# Altium PCB DaughterBoards.PcbDoc (part 3 of 4)
Units mil, origin at the board's own origin, x right, y up, seen from the top; angles counter-clockwise.
Board outline 8080.87 x 6506.06 mil, 4 copper layers (Top Layer, Top, Mid-Layer 1, GND, Mid-Layer 2, VCC, Bottom Layer, Bottom), stack 18.2 mil thick; 508 components, 296 nets, 1635 pads, 376 vias.
Unrouted connection lines stored in the file: 28.
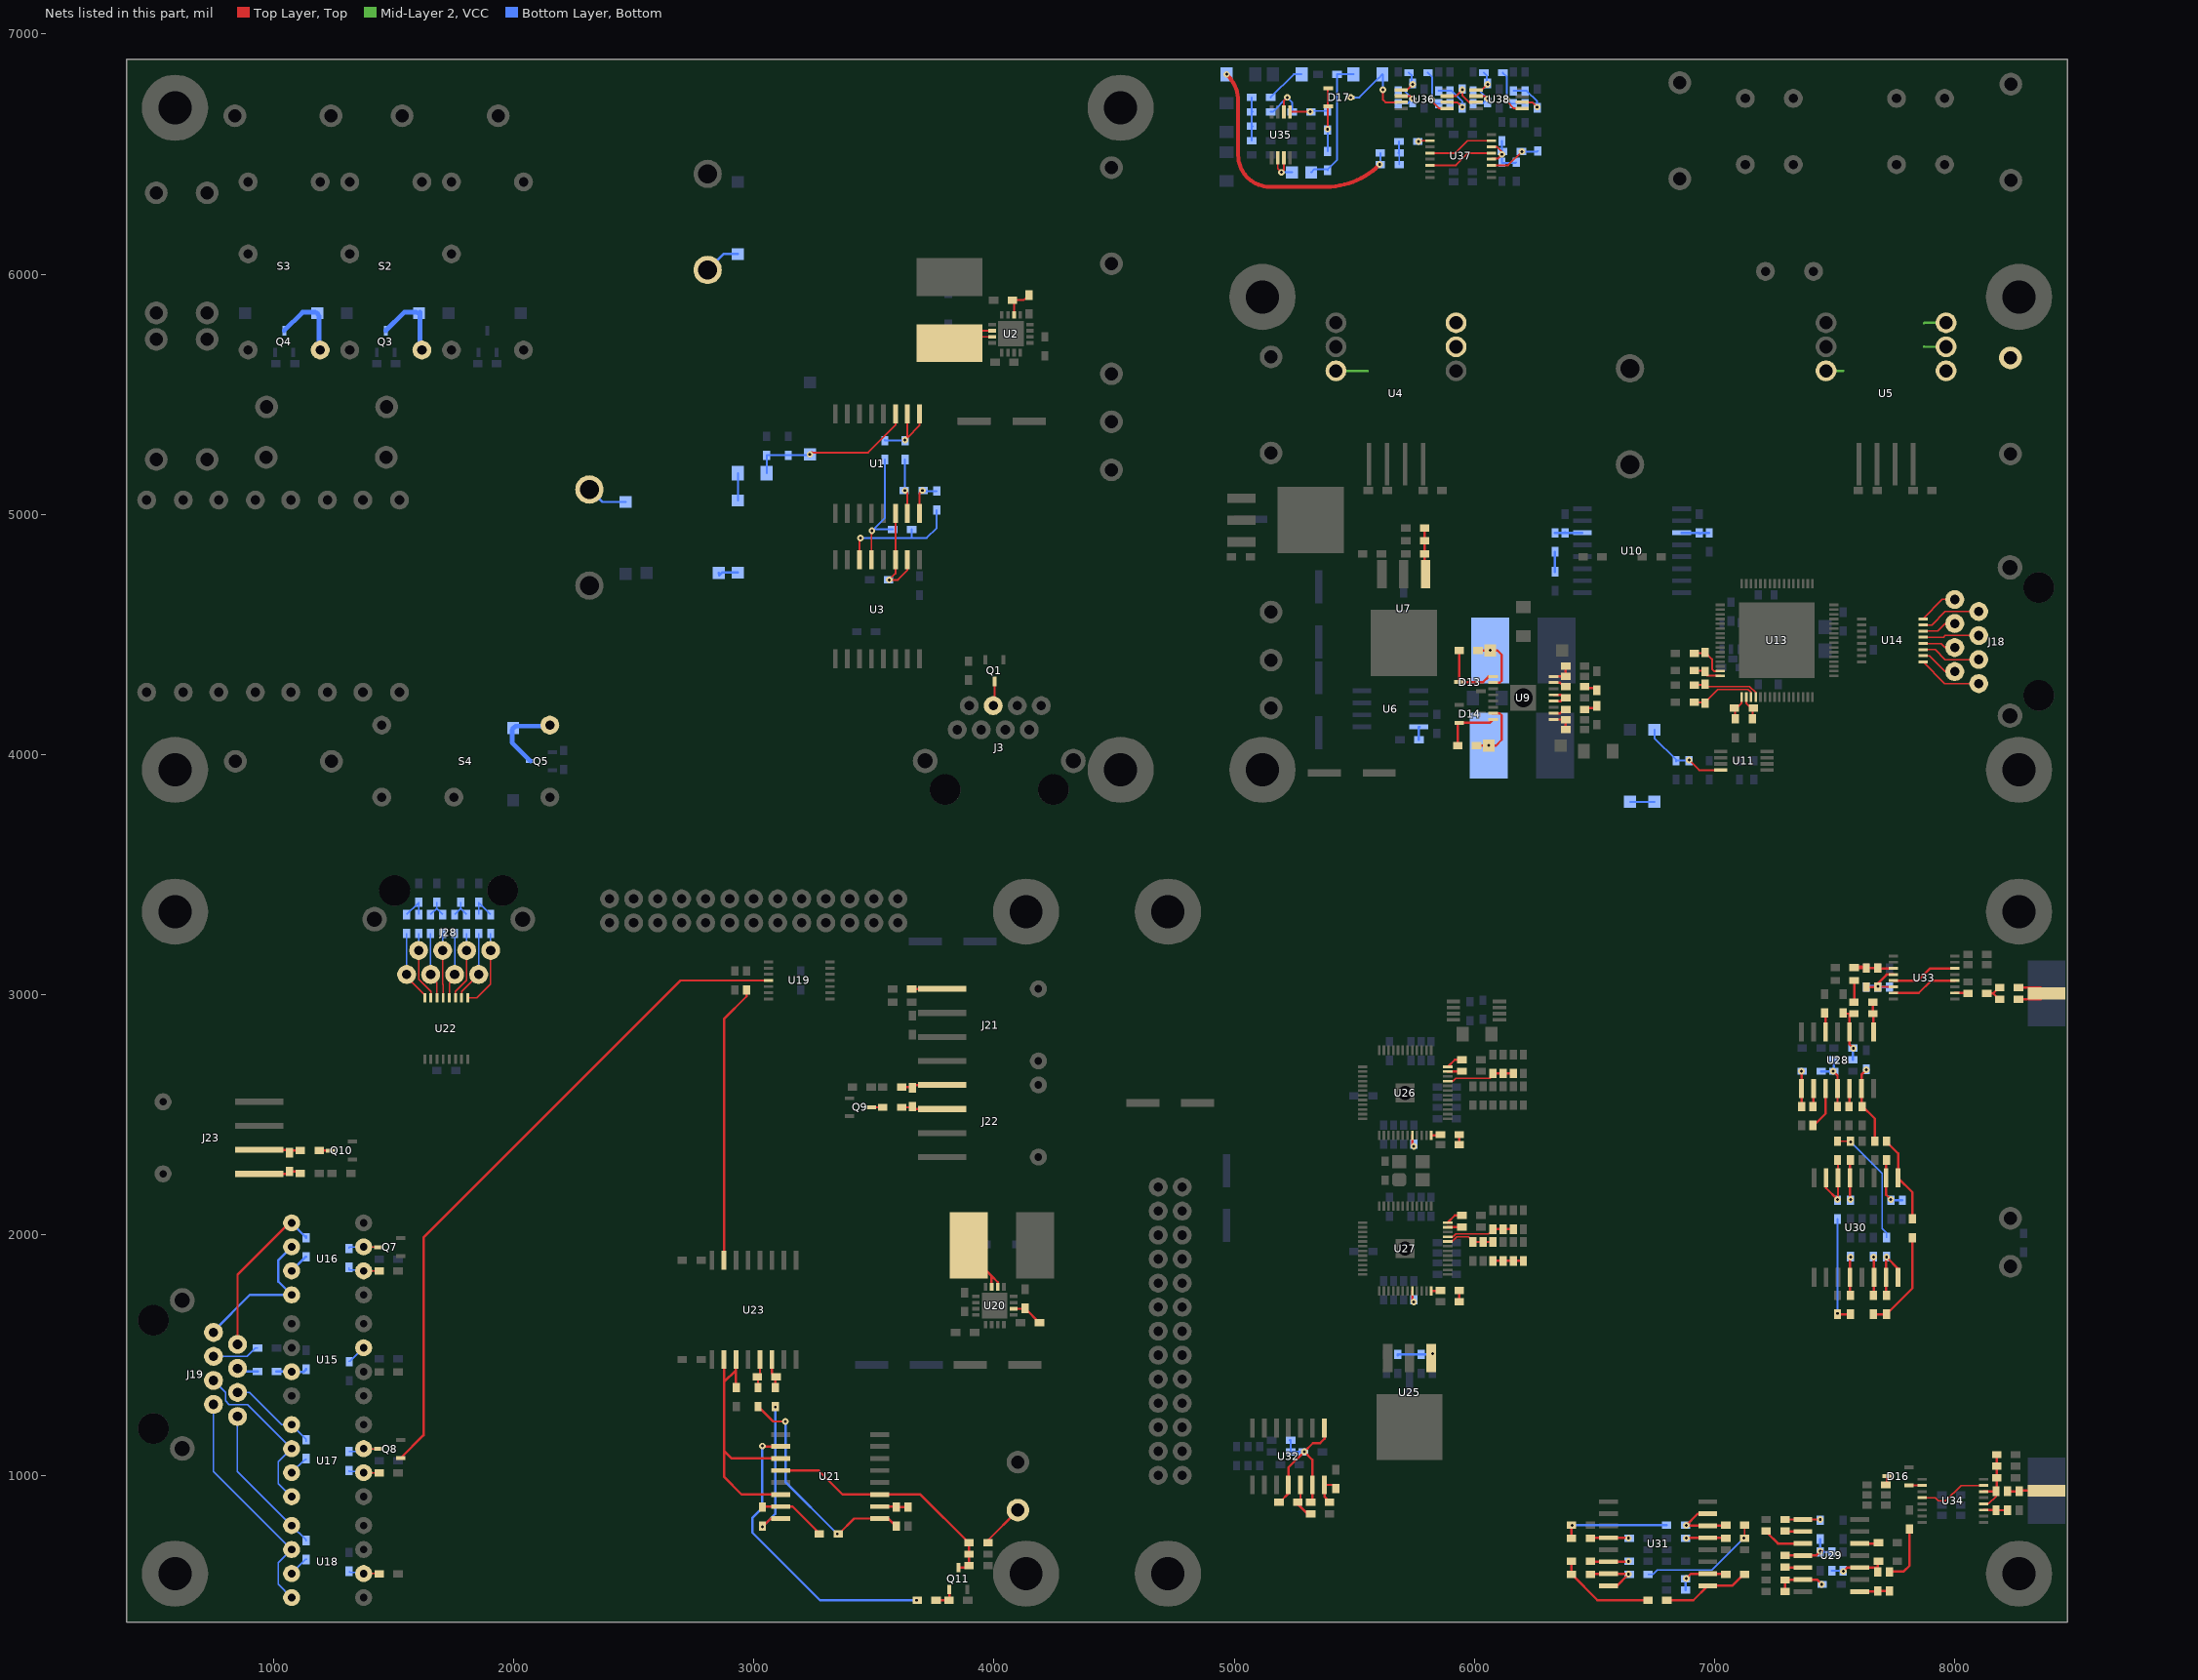
[diagram p5: the nets of this part, all layers, seen from the top]

## Via types
v1: diameter 27.56, hole 11.81, Top Layer, Top to Bottom Layer, Bottom, 373 vias
v2: diameter 98.43, hole 78.74, Top Layer, Top to Bottom Layer, Bottom, 2 vias
v3: diameter 157.48, hole 137.8, Top Layer, Top to Bottom Layer, Bottom, 1 vias

## Nets (pads, with @x,y where several pads share a name; then routed paths per layer and width w, separated by ;. In a path a pad name is that pad's centre, name@x,y a point inside that pad or via, vN(x,y) a via of type N, cw(c..) or ccw(c..) an arc to the next point about the centre after c; other vN are vias at no path point) (continued)
NET00006: C120.1 R96.1 R97.1 U26.21 | length 335.9
  Top Layer, Top w5.98: U26.21@5889.17,2641.21 5911.21,2641.21 5922,2652 5952,2652
  Top Layer, Top w6: 5952,2652 6066,2652 6078,2664 R97.1@6078,2672.63 6081.37,2672.63 6111.37,2672.63 6114,2670 R96.1@6120,2672.63
  Top Layer, Top w9.84: R97.1@6078,2676 6081.37,2672.63 6111.37,2672.63 R96.1@6120,2672.63 C120.1@6162,2672.63
NET00007: R50.1 R51.1 U15.3 | length 129.3
  Bottom Layer, Bottom w9.84: R50.1@1013.37,1433 1067.98,1433 1070.98,1430 U15.3@1076,1431 1126.98,1431 1135.98,1440 R51.1@1136,1441.63
NET00008: J18.8 U14.16 | length 165.4
  Top Layer, Top w5.98: U14.16@7867.95,4565.57 7948.37,4645.98 J18.8@8000,4646
NET00009: C9.2 R24.1 U3.6 | length 537.7
  Top Layer, Top w7.87: U3.6@3440,4812 3440,4898 v1(3444,4902)
  Bottom Layer, Bottom w7.87: v1(3444,4902) 3657.37,4902 ; C9.2@3657.37,4938 3657.37,4902 ; R24.1@3762,5018.63 3762,4944 3720,4902 3657.37,4902
NET00010: D8.1 Q3.3 S2.2 | length 336.2
  Bottom Layer, Bottom w19.68: Q3.3@1468.36,5765.24 1544.88,5841.76 1594.35,5841.76 D8.1@1606.16,5837.83 1610.09,5841.76 1610.09,5692.94 S2.2@1618.36,5684.68
NET00011: R190.2 R191.2 R195.1 U38.6 | length 214.7
  Top Layer, Top w7.87: U38.6@6199.07,6715.77 6241.93,6715.77 v1(6261.7,6696)
  Bottom Layer, Bottom w7.87: R191.2@6163.24,6763.61 R190.2@6211.28,6763.61 6218.09,6763.61 6261.7,6720 v1(6261.7,6696) R195.1@6261.7,6692.63
NET00012: C115.1 U26.8 | length 56.1
  Top Layer, Top w9.84: U26.8@5741.53,2414.83 5741.53,2376.47 v1(5748,2370)
  Bottom Layer, Bottom w9.84: v1(5748,2370) C115.1@5748,2378.63
NET00013: C114.1 R93.2 | length 46.8
  Top Layer, Top w9.84: C114.1@5937.37,2376 5934,2376 5937.37,2379.37 R93.2@5937.37,2418
NET00014: R93.1 U26.12 | length 39.7
  Top Layer, Top w9.84: U26.12@5820.27,2414.83 5846.83,2414.83 5850,2418 R93.1@5858.63,2418
NET00015: R56.2 R59.2 U16.2 | length 138
  Top Layer, Top w5.98: U16.2@1376,1851 1390,1850 R59.2@1440.63,1850
  Bottom Layer, Bottom w5.98: R56.2@1315,1865.63 1315,1855 1372,1855 U16.2@1376,1851
NET00016: R188.2 R189.2 R194.1 U38.2 | length 209.9
  Top Layer, Top w7.87: U38.2@6007.14,6741.36 6044.74,6741.36 v1(6055.17,6730.93)
  Bottom Layer, Bottom w7.87: R189.2@5995.13,6710.26 6034.5,6710.26 v1(6055.17,6730.93) ; R188.2@5995.13,6763.61 6022.5,6763.61 v1(6055.17,6730.93) ; R194.1@6055.17,6715.57 v1(6055.17,6730.93)
NET00017: Q7.3 R56.1 U16.3 | length 130.6
  Top Layer, Top w5.98: U16.3@1376,1951 1390,1950 Q7.3@1439.47,1950
  Bottom Layer, Bottom w5.98: R56.1@1315,1944.37 1315,1950 1375,1950 U16.3@1376,1951
NET00018: C187.1 R192.2 R193.2 U38.5 | length 283.9
  Top Layer, Top w7.87: v1(6135.7,6726) 6135.7,6720 6165.52,6690.18 U38.5@6199.07,6690.18
  Bottom Layer, Bottom w7.87: C187.1@6118.56,6839 6135.7,6821.86 v1(6135.7,6726) 6151.44,6710.26 R193.2@6163.24,6710.26 R192.2@6211.28,6710.26
NET00019: U5.1 U5.4 U5.5 | length 257.7
  Mid-Layer 2, VCC w9.84: U5.1@7464,5598 7536,5598 ; 7872,5700 7874,5698 U5.5@7964,5698 ; 7872,5796 7874,5798 U5.4@7964,5798
NET00020: D9.1 Q4.3 S3.2 | length 327.7
  Bottom Layer, Bottom w19.68: Q4.3@1045.12,5765.24 1121.64,5841.76 1175.04,5841.76 D9.1@1182.91,5837.83 1190.79,5826.02 1190.79,5689.01 S3.2@1195.12,5684.68
NET00021: R187.2 U36.7 U38.3 | length 170.2
  Top Layer, Top w7.87: U36.7@5887.07,6741.36 5923.06,6741.36 v1(5949.7,6768) 5949.7,6744 5977.93,6715.77 U38.3@6007.14,6715.77
  Bottom Layer, Bottom w7.87: v1(5949.7,6768) R187.2@5949.7,6771.37
NET00022: C31.2 D13.3 U9.1 | length 286.9
  Top Layer, Top w9.84: C31.2@5936.63,4434 5936.63,4304.63 5934,4302 D13.3@5936.47,4302 6036,4302 6059.57,4325.57 U9.1@6078.02,4325.57
NET00023: R31.1 U9.15 | length 57.3
  Top Layer, Top w9.84: U9.15@6329.98,4299.98 6356.02,4299.98 6372,4284 R31.1@6380.63,4284
NET00024: R55.2 U15.7 | length 87
  Bottom Layer, Bottom w5.98: R55.2@1316,1472.37 1315,1475 1320,1475 U15.7@1376,1531
NET00025: C181.2 R186.2 U36.1 | length 112.3
  Top Layer, Top w7.87: U36.1@5695.14,6766.95 5719.16,6766.95 v1(5743.17,6790.97)
  Bottom Layer, Bottom w7.87: C181.2@5727.82,6839 5739.7,6827.12 5739.7,6798 R186.2@5743.17,6794.31 v1(5743.17,6790.97)
NET00026: J19.2 R52.2 U16.5 | length 694.3
  Top Layer, Top w9.84: J19.2@850.98,1545 850.98,1835 1066.98,2051 U16.5@1076,2051
  Bottom Layer, Bottom w9.84: U16.5@1076,2051 1132,1995 1135.98,1995 R52.2@1136,1988.37
NET00027: C187.2 R194.2 U38.1 | length 112.3
  Top Layer, Top w7.87: U38.1@6007.14,6766.95 6031.16,6766.95 v1(6055.17,6790.97)
  Bottom Layer, Bottom w7.87: C187.2@6039.82,6839 6051.7,6827.12 6051.7,6798 R194.2@6055.17,6794.31 v1(6055.17,6790.97)
NET00028: C178.2 J41.1 R175.2 R176.1 | length 557.7
  Bottom Layer, Bottom w7.87: R175.2@5320.91,6424.21 5332.91,6436.22 R176.1@5388.98,6436.22 ; R176.1@5388.98,6432.87 R176.1@5388.98,6436.22 ; J41.1@5497.09,6832.48 C178.2@5428.35,6832.48 5428.35,6475.59 R176.1@5388.98,6436.22
NET00029: R52.1 U16.7 | length 84.8
  Bottom Layer, Bottom w9.84: U16.7@1076,1851 1135,1910 1135.98,1910 R52.1@1136,1909.63
NET00030: R33.1 R34.1 U9.9 | length 97.6
  Top Layer, Top w9.84: U9.9@6329.98,4146.43 6371.57,4146.43 6372,4146 R33.1@6380.63,4146 6384,4146 6380.63,4142.63 R34.1@6380.63,4104
NET00031: J19.1 U16.6 U16.8 | length 639
  Bottom Layer, Bottom w9.84: J19.1@750.98,1595 750,1596 750.98,1596.98 750.98,1600 901.98,1751 U16.8@1076,1751 1020.98,1806.02 1020.98,1895.98 U16.6@1076,1951
NET00032: R32.1 U9.10 | length 57.3
  Top Layer, Top w9.84: U9.10@6329.98,4172.02 6356.02,4172.02 6372,4188 R32.1@6380.63,4188
NET00033: D10.1 Q5.3 S4.2 | length 327.7
  Bottom Layer, Bottom w19.68: Q5.3@2070.76,3973.12 1994.24,4049.64 1994.24,4103.04 D10.1@1998.17,4110.91 2009.98,4118.79 2146.99,4118.79 S4.2@2151.32,4123.12
NET00034: C36.1 D14.2 U9.8 | length 247.3
  Top Layer, Top w9.84: C36.1@5930.63,4038 5930.63,4130.63 5934,4134 D14.2@5936.53,4132.5 5940,4134 6065.58,4134 U9.8@6078.02,4146.43
NET00035: C32.1 R31.2 | length 58.2
  Top Layer, Top w9.84: R31.2@6459.37,4284 6465.37,4278 6504,4278 C32.1@6510,4268.63
NET00036: C86.2 R90.1 R91.2 U25.1 | length 172.7
  Top Layer, Top w9.84: U25.1@5820.55,1488 5820.55,1500.55 v1(5826,1506)
  Bottom Layer, Bottom w9.84: R91.2@5682,1503.37 5682,1500 5685.37,1503.37 C86.2@5778,1503.37 5823.37,1503.37 v1(5826,1506) R90.1@5826,1503.37
NET00037: R29.2 R30.1 U9.16 | length 93.9
  Top Layer, Top w9.84: U9.16@6329.98,4325.57 6371.57,4325.57 6372,4326 R30.1@6378,4326 ; R30.1@6380.63,4326 R30.1@6378,4326 ; R29.2@6380.63,4368 6380.63,4328.63 R30.1@6378,4326
NET00038: C31.1 D12.2 L2.2 U9.2 | length 253.6
  Top Layer, Top w9.84: C31.1@6015.37,4434 v1(6066,4434) 6096,4434 6114,4416 6114,4308 6105.98,4299.98 U9.2@6078.02,4299.98
  Bottom Layer, Bottom w9.84: v1(6066,4434) L2.2@6066.2,4434
NET00039: R92.1 U26.24 | length 71.8
  Top Layer, Top w9.84: U26.24@5889.17,2700.27 5918.9,2730 R92.1@5948.63,2730
NET00040: C113.1 U26.23 | length 60.1
  Top Layer, Top w9.84: U26.23@5889.17,2680.58 5944.58,2680.58 5946,2682 C113.1@5948.63,2682
NET00041: J19.5 U17.6 U17.8 | length 708.7
  Bottom Layer, Bottom w5.98: J19.5@750.98,1395 800.98,1345 800.98,1310 815.98,1295 892,1295 U17.6@1076,1111 1020.98,1055.98 1020.98,966.02 U17.8@1076,911
NET00042: J3.4 Q1.3 | length 103.7
  Top Layer, Top w7.87: J3.4@3997.15,4204 4002,4206 Q1.3@4002,4304.47
NET00043: R53.1 U17.7 | length 87
  Bottom Layer, Bottom w5.98: U17.7@1076,1011 1130,1065 1135.98,1065 R53.1@1136,1069.63
NET00044: J19.6 R53.2 U17.5 | length 384.7
  Bottom Layer, Bottom w5.98: J19.6@850.98,1345 900.98,1345 1034.98,1211 U17.5@1076,1211 1135.98,1151.02 1135.98,1140 R53.2@1136,1148.37
NET00045: C1.2 C2.1 R4.1 R5.2 | length 324.4
  Bottom Layer, Bottom w9.84: C1.2@2316,5104 2322,5100 2370,5052 R4.1@2466,5052 ; C2.1@2808,6018 2874,6084 R5.2@2934,6084
NET00046: R57.2 R61.2 U17.2 | length 133
  Top Layer, Top w5.98: U17.2@1376,1011 1385,1010 R61.2@1440.63,1010
  Bottom Layer, Bottom w5.98: R57.2@1315,1020.63 1315,1015 1372,1015 U17.2@1376,1011
NET00047: C36.2 D15.2 L3.1 U9.7 | length 256.1
  Top Layer, Top w9.84: C36.2@6009.37,4038 v1(6060,4038) 6090,4038 6114,4062 6114,4164 6105.98,4172.02 U9.7@6078.02,4172.02
  Bottom Layer, Bottom w9.84: v1(6060,4038) L3.1@6060.2,4038
NET00048: L1.1 U2.14 U2.15 | length 302.3
  Top Layer, Top w7.87: L1.1@3815.17,5713.09 3858,5736 3861.66,5739.66 L1.1@3915.66,5739.66 ; L1.1@3894,5718 L1.1@3915.66,5739.66 ; U2.15@3992.33,5739.66 L1.1@3915.66,5739.66 ; U2.14@3992.33,5765.25 3941.25,5765.25 L1.1@3915.66,5739.66
NET00049: C34.1 U9.12 U9.13 | length 103.3
  Top Layer, Top w9.84: U9.12@6329.98,4223.2 6359.2,4223.2 C34.1@6372,4236 ; U9.13@6329.98,4248.8 6359.2,4248.8 C34.1@6372,4236 ; C34.1@6380.63,4236 C34.1@6372,4236
NET00050: Q8.3 R57.1 U17.3 | length 129.7
  Top Layer, Top w5.98: U17.3@1376,1111 1385,1110 Q8.3@1439.47,1110
  Bottom Layer, Bottom w5.98: R57.1@1315,1099.37 1315,1100 1365,1100 U17.3@1376,1111
NET00051: J12.1 U5.6
NET00052: R25.1 R26.2 U2.10 | length 145.7
  Top Layer, Top w7.87: U2.10@4083.87,5831.2 4083.87,5882.13 4074,5892 R25.1@4077.37,5892 4124.63,5892 R26.2@4146,5913.37
NET00053: C35.1 R32.2 | length 62.5
  Top Layer, Top w9.84: R32.2@6459.37,4188 6465.37,4194 6510,4194 C35.1@6510,4203.37
NET00054: J18.7 U14.15 | length 255.2
  Top Layer, Top w5.98: U14.15@7867.95,4539.98 7903.99,4539.98 7960,4595.98 J18.7@8100,4596
NET00055: R40.1 R41.2 | length 102
  Bottom Layer, Bottom w7.87: R40.1@6648,3804 R41.2@6750,3804
NET00056: J21.1 R65.2 | length 134.5
  Top Layer, Top w9.84: R65.2@3657.37,3024 3660,3018 3667,3025 J21.1@3785,3025
NET00057: R16.1 R17.1 | length 94.2
  Bottom Layer, Bottom w9.84: R16.1@2854.43,4757.1 2856,4746 2868,4758 R17.1@2934,4758
NET00058: R17.2 R18.2 | length 114
  Bottom Layer, Bottom w7.87: R17.2@2934,5058 R18.2@2934,5172
NET00059: C24.2 R27.1 R28.2 U7.1 | length 196.8
  Top Layer, Top w9.84: C24.2@5793.37,4944 R28.2@5793.37,4890 R27.1@5793.37,4836 U7.1@5793.37,4796.63 ; U7.1@5796,4794 U7.1@5793.37,4796.63 ; U7.1@5796.55,4752 5796,4776 5793.37,4778.63 U7.1@5793.37,4796.63
NET00060: R20.1 R23.2 U1.1 U1.2 | length 321.2
  Top Layer, Top w7.87: v1(3630,5310) 3640,5320 ; U1.2@3640,5418 3640,5320 ; U1.1@3690,5418 3690,5370 3640,5320
  Bottom Layer, Bottom w7.87: R23.2@3546,5307.37 3546,5310 3548.63,5307.37 R20.1@3630,5307.37 v1(3630,5310)
NET00061: C26.1 U6.8 | length 58.9
  Bottom Layer, Bottom w9.84: U6.8@5768.22,4116 5772,4116 5769.37,4113.37 C26.1@5769.37,4062
NET00062: J19.8 R54.2 U18.5 | length 641.4
  Bottom Layer, Bottom w5.98: J19.8@850.98,1245 850.98,1016.02 U18.5@1076,791 1135.98,731.02 1135.98,725 R54.2@1136,728.37
NET00063: R21.1 R24.2 U1.16 | length 164.8
  Top Layer, Top w7.87: U1.16@3690,5004.61 3690,5088 v1(3702,5100)
  Bottom Layer, Bottom w7.87: R21.1@3705.37,5100 v1(3702,5100) 3704.63,5097.37 R24.2@3762,5097.37
NET00064: R20.2 R21.2 U1.15 | length 231.5
  Top Layer, Top w7.87: v1(3630,5100) 3640,5090 U1.15@3640,5004.61
  Bottom Layer, Bottom w7.87: R21.2@3626.63,5100 v1(3630,5100) R20.2@3630,5228.63
NET00065: C10.1 U1.14 U3.2 U3.3 | length 433.7
  Top Layer, Top w7.87: v1@3558,4728 v1(3564,4728) ; U1.14@3590,5004.61 3590,4820 3588,4818 U3.3@3590,4812 3590,4754 v1(3564,4728) ; U3.2@3640,4812 3640,4768 3600,4728 v1(3564,4728)
  Bottom Layer, Bottom w7.87: C10.1@3561.37,4728 v1(3564,4728)
NET00066: C9.1 R23.1 U3.5 | length 520.5
  Top Layer, Top w7.87: U3.5@3490,4812 3490,4930 v1(3492,4932)
  Bottom Layer, Bottom w7.87: v1(3492,4932) v1@3498,4938 ; R23.1@3546,5228.63 3546,4986 v1@3498,4938 ; C9.1@3578.63,4938 v1@3498,4938
NET00067: R54.1 U18.7 | length 94.4
  Bottom Layer, Bottom w5.98: U18.7@1076,591 1135,650 1140.98,650 R54.1@1136,649.63
NET00068: J19.7 U18.6 U18.8 | length 984.2
  Bottom Layer, Bottom w5.98: J19.7@750.98,1295 750.98,1016.02 U18.6@1076,691 1020.98,635.98 1020.98,546.02 U18.8@1076,491
NET00069: J18.6 U14.14 | length 145.1
  Top Layer, Top w5.98: U14.14@7867.95,4514.39 7928.4,4514.39 7960,4545.98 J18.6@8000,4546
NET00070: R58.2 R62.2 U18.2 | length 138
  Top Layer, Top w5.98: U18.2@1376,591 1434,591 1440,585 R62.2@1440.63,590
  Bottom Layer, Bottom w5.98: R58.2@1315,600.63 1320.63,595 1375,595 U18.2@1376,591
NET00071: J18.5 U14.13 | length 235
  Top Layer, Top w5.98: U14.13@7867.95,4488.8 7952.81,4488.8 7960,4495.98 J18.5@8100,4496
NET00072: J19.4 R50.2 | length 88.6
  Bottom Layer, Bottom w9.84: J19.4@850.98,1445 862.98,1433 R50.2@934.63,1433
NET00073: J19.3 R49.2 | length 197.7
  Bottom Layer, Bottom w5.98: J19.3@750.98,1495 890.98,1495 924.98,1529 R49.2@934.63,1529
NET00074: J18.4 U14.12 | length 139.2
  Top Layer, Top w5.98: U14.12@7867.95,4463.2 7942.78,4463.2 7960,4445.98 J18.4@8000,4446
NET00075: C79.2 R89.1 U23.6 | length 126
  Top Layer, Top w9.84: U23.6@3076,1482 3076,1424 3084,1416 C79.2@3093.37,1410 3090,1404 R89.1@3090,1365.37
NET00076: J18.3 U14.11 | length 249.3
  Top Layer, Top w5.98: U14.11@7867.95,4437.61 7918.37,4437.61 7960,4395.98 J18.3@8100,4396
NET00077: J18.2 U14.10 | length 159.4
  Top Layer, Top w5.98: U14.10@7867.95,4412.02 7893.96,4412.02 7960,4345.98 J18.2@8000,4346
NET00078: J18.1 U14.9 | length 269.5
  Top Layer, Top w5.98: U14.9@7867.95,4386.43 7958.4,4295.98 J18.1@8100,4296
NET00079: R198.2 U23.15 | length 1164.2
  Top Layer, Top w9.84: U23.15@2876,1895.39 2876,2900 2970,2994 R198.2@2970,3020.63
NET00080: C142.2 R143.1 U30.6 U30.7 | length 278.8
  Top Layer, Top w9.84: U30.7@7464,2238 7464,2196 v1(7512,2148) 7514,2150 U30.6@7514,2238 7514,2308 7512,2310 C142.2@7512,2312.63
  Bottom Layer, Bottom w9.84: R143.1@7512,2145.37 v1(7512,2148)
NET00082: C146.2 R128.1 U30.15 U30.16 | length 266.2
  Top Layer, Top w9.84: C146.2@7716,1749.37 7716,1752 7714,1754 U30.15@7714,1824.61 7714,1906 v1(7716,1908) 7764,1860 U30.16@7764,1824.61
  Bottom Layer, Bottom w9.84: v1(7716,1908) R128.1@7716,1910.63
NET00086: J22.1 R63.2 R66.2 | length 176
  Top Layer, Top w9.84: R66.2@3615.37,2616 R63.2@3660,2616 ; R63.2@3660,2613.37 R63.2@3660,2616 ; J22.1@3785,2625 3669,2625 R63.2@3660,2616
NET00087: J22.2 R63.1 R67.2 | length 181.2
  Top Layer, Top w9.84: R67.2@3615.37,2532 3654,2532 R63.1@3660,2526 ; R63.1@3660,2534.63 R63.1@3660,2526 ; J22.2@3785,2525 3661,2525 R63.1@3660,2526
NET00088: Q8.1 U19.4 | length 2836.9
  Top Layer, Top w9.84: Q8.1@1530.47,1072.5 1625,1167.03 1625,1990 2695,3060 U19.4@3062.05,3060
NET00099: L4.1 U20.14 U20.15 | length 261.3
  Top Layer, Top w9.84: L4.1@3895.54,1957.93 3950,1875 3965,1860 3965,1855 3990.45,1829.55 ; U20.15@3990.45,1784.92 3990.45,1829.55 ; U20.14@4016.04,1784.92 4016.04,1803.96 3990.45,1829.55
NET00100: R71.1 R72.2 U20.10 | length 140.5
  Top Layer, Top w9.84: U20.10@4081.98,1693.39 4126.61,1693.39 4130,1690 R71.1@4130,1695 ; R71.1@4130,1695.63 R71.1@4130,1695 ; R72.2@4189.37,1635 4190,1635 R71.1@4130,1695
NET00102: Q9.3 R67.1 | length 47.1
  Top Layer, Top w9.84: Q9.3@3489.53,2532 R67.1@3536.63,2532
NET00103: J23.2 R64.1 R69.2 | length 180.5
  Top Layer, Top w9.84: J23.2@940.98,2355 1059,2355 R64.1@1068,2346 ; R64.1@1068,2343.37 R64.1@1068,2346 ; R69.2@1112.63,2352 1074,2352 R64.1@1068,2346
NET00104: J23.1 R64.2 R68.2 | length 184.3
  Top Layer, Top w9.84: J23.1@940.98,2255 1067,2255 1068,2256 R64.2@1068,2264.63 1101.37,2264.63 1110,2256 R68.2@1112.63,2256
NET00113: Q10.3 R69.1 | length 47.1
  Top Layer, Top w9.84: R69.1@1191.37,2352 Q10.3@1238.47,2352
NET00114: J28.8 R82.2 U22.8 | length 298.9
  Top Layer, Top w5.98: J28.8@1555,3085 1555,3075 1630.43,2999.57 U22.8@1630.43,2987.95
  Bottom Layer, Bottom w5.98: J28.8@1555,3085 R82.2@1555,3255.63
NET00115: J28.5 R79.2 U22.5 | length 268.6
  Top Layer, Top w5.98: J28.5@1705,3185 1705,3045 1707.2,3042.8 U22.5@1707.2,2987.95
  Bottom Layer, Bottom w5.98: J28.5@1705,3185 R79.2@1705,3255.63
NET00116: J28.2 R75.2 U22.2 | length 297.1
  Top Layer, Top w5.98: U22.2@1783.98,2987.95 1783.98,3013.98 J28.2@1855,3085
  Bottom Layer, Bottom w5.98: J28.2@1855,3085 R75.2@1855,3255.63
NET00117: J28.6 R80.2 U22.6 | length 276.4
  Top Layer, Top w5.98: J28.6@1655,3085 1680,3050 1681.61,3048.39 U22.6@1681.61,2987.95
  Bottom Layer, Bottom w5.98: J28.6@1655,3085 R80.2@1655,3255.63
NET00118: J28.7 R81.2 U22.7 | length 288.8
  Top Layer, Top w5.98: J28.7@1605,3185 1605,3065 1656.02,3013.98 U22.7@1656.02,2987.95
  Bottom Layer, Bottom w5.98: J28.7@1605,3185 R81.2@1605,3255.63
NET00119: J28.1 R73.2 U22.1 | length 329.7
  Top Layer, Top w5.98: U22.1@1809.57,2987.95 1847.95,2987.95 1905,3045 J28.1@1905,3185
  Bottom Layer, Bottom w5.98: J28.1@1905,3185 R73.2@1905,3255.63
NET00120: J28.3 R76.2 U22.3 | length 287
  Top Layer, Top w5.98: U22.3@1758.39,2987.95 1758.39,3013.39 1805,3060 J28.3@1805,3185
  Bottom Layer, Bottom w5.98: J28.3@1805,3185 R76.2@1805,3255.63
NET00121: J28.4 R78.2 U22.4 | length 273.9
  Top Layer, Top w5.98: U22.4@1732.8,2987.95 1732.8,3047.8 1735,3050 J28.4@1755,3085
  Bottom Layer, Bottom w5.98: J28.4@1755,3085 R78.2@1755,3255.63
NET00122: C72.1 R73.1 R75.1 | length 120.2
  Bottom Layer, Bottom w5.98: R75.1@1855,3334.37 C72.1@1855,3380 ; C72.1@1855,3385.63 C72.1@1855,3380 ; R73.1@1905,3334.37 1859.37,3380 C72.1@1855,3380
NET00124: C123.2 C127.1 R106.1 R107.1 | length 133.1
  Top Layer, Top w9.84: C123.2@6078,1892.63 R107.1@6120,1892.63 R106.1@6162,1892.63 C127.1@6204,1892.63 6207.37,1892.63 C127.1@6210,1890
NET00125: C74.1 R76.1 R78.1 | length 97
  Bottom Layer, Bottom w5.98: R78.1@1755,3334.37 1780,3359.37 ; C74.1@1780,3385.63 1780,3359.37 ; R76.1@1805,3334.37 1780,3359.37
NET00128: C76.1 R79.1 R80.1 | length 97
  Bottom Layer, Bottom w5.98: R80.1@1655,3334.37 1680,3359.37 ; C76.1@1680,3385.63 1680,3359.37 ; R79.1@1705,3334.37 1680,3359.37
NET00131: C77.1 R81.1 R82.1 | length 120.2
  Bottom Layer, Bottom w5.98: R82.1@1555,3334.37 1600.63,3380 C77.1@1605,3380 ; R81.1@1605,3334.37 C77.1@1605,3380 ; C77.1@1605,3385.63 C77.1@1605,3380
NET00134: C75.1 Q11.3 R74.1 R77.2 U21.3 U21.12 | length 1064.4
  Top Layer, Top w9.84: U21.12@3111.61,1020 3270,1020 3370,920 U21.3@3525,920 3694,920 3894,720 R74.1@3896.63,720 3896.63,675.37 3900,672 R77.2@3896.63,672 3896.63,627.37 3900,624 C75.1@3896.63,624 3894,618 3891.53,615.53 Q11.3@3852,615.53
NET00135: C123.1 R102.1 R103.1 U27.20 | length 214
  Top Layer, Top w6: U27.20@5889.17,1973.53 5909.53,1973.53 5928,1992 5976,1992 5994,1974 R102.1@5994,1971.37
  Top Layer, Top w9.84: R102.1@5988,1968 5991.37,1971.37 R102.1@5994,1971.37 R103.1@6036,1971.37 C123.1@6078,1971.37
NET00136: C122.1 R100.1 R101.1 U27.21 | length 290.5
  Top Layer, Top w5.98: U27.21@5889.17,1993.21 5911.21,1993.21 5922,2004 5946,2004
  Top Layer, Top w6: 5946,2004 6060,2004 6072,2016 R100.1@6078,2024.63
  Top Layer, Top w9.84: R100.1@6078,2024.63 R101.1@6120,2024.63 6159.37,2024.63 6162,2022 C122.1@6162,2024.63
NET00137: R83.1 R84.2 R88.2 U21.1 | length 986.6
  Top Layer, Top w9.84: R88.2@3018,1286.63 3080.63,1224 v1(3132,1224) ; v1(3348,756) R83.1@3351.37,756 3354,756 3418,820 U21.1@3525,820 3560,820 3594,786 R84.2@3594,788.63
  Bottom Layer, Bottom w9.84: v1(3132,1224) 3132,972 v1(3348,756)
NET00139: C79.1 R88.1 U23.5 | length 127.7
  Top Layer, Top w9.84: R88.1@3018,1365.37 3018,1404 C79.1@3014.63,1410 3024,1410 3026,1412 U23.5@3026,1482
NET00140: R86.1 R89.2 U21.16 | length 613.7
  Top Layer, Top w9.84: v1(3036,786) R86.1@3036,788.63 3042,792 3070,820 U21.16@3111.61,820 ; v1(3090,1284) R89.2@3090,1286.63
  Bottom Layer, Bottom w9.84: v1(3036,786) 3090,840 v1(3090,1284)
NET00141: R83.2 R86.2 U21.15 | length 297.8
  Top Layer, Top w9.84: R86.2@3036,867.37 3030,870 U21.15@3111.61,870 3162,870 3270,762 R83.2@3272.63,756
NET00143: J29.1 R74.2 | length 186.4
  Top Layer, Top w9.84: R74.2@3975.37,720 3975.37,729.37 4098,852 J29.1@4100,855
NET00144: R84.1 R85.2 U21.2 | length 124.4
  Top Layer, Top w9.84: U21.2@3525,870 3594,870 R84.1@3594,867.37 3638.63,867.37 3642,864 R85.2@3642,867.37
NET00145: C80.1 U21.11 U21.14 U23.2 U23.3 | length 1191.3
  Top Layer, Top w9.84: U23.2@2876,1482 2876,1388 ; U23.3@2926,1482 2926,1438 ; C80.1@2928,1365.37 2928,1368 2926,1370 2926,1438 ; U21.14@3111.61,920 2988,920 2950,920 2876,994 2876,1102 ; U21.11@3111.61,1070 2908,1070 2876,1102 ; 2876,1102 2876,1388 ; 2876,1388 2926,1438
NET00146: R87.2 U21.10 | length 1257.3
  Top Layer, Top w9.84: v1(3036,1122) 3038,1120 U21.10@3111.61,1120 ; v1(3678,480) R87.2@3680.63,480
  Bottom Layer, Bottom w9.84: v1(3036,1122) 3036,864 2994,822 2994,762 3276,480 v1(3678,480)
NET00147: C73.1 Q11.1 R87.1 | length 101.8
  Top Layer, Top w9.84: R87.1@3759.37,480 C73.1@3812.63,480 3816,480 3814.5,481.5 Q11.1@3814.5,524.53
NET00148: C6.1 D22.2 R18.1 R19.2 U1.3 | length 720.3
  Top Layer, Top w7.87: v1@3242,5258 3476,5258 3590,5372 U1.3@3590,5418
  Top Layer, Top w9.84: v1(3234,5250) v1@3242,5258
  Bottom Layer, Bottom w7.87: R18.1@3054,5172 R19.2@3054,5244 ; R19.2@3054,5246.63 R19.2@3054,5244 ; D22.2@3234,5238 D22.2@3234,5246.63 ; v1(3234,5250) D22.2@3234,5246.63 ; R19.2@3054,5244 3056.63,5246.63 C6.1@3144,5246.63 D22.2@3234,5246.63
NET00152: C170.2 R163.1 R164.2 R165.1 U34.4 U34.6 | length 304.8
  Top Layer, Top w5.98: U34.4@8119.95,881.2 8141.2,881.2 8172,912 8172,930 R165.1@8172,933.37 R165.1@8172,936
  Top Layer, Top w9.84: U34.6@8119.95,932.39 R165.1@8168.39,932.39 ; R165.1@8166,930 R165.1@8168.39,932.39 ; R165.1@8172,933.37 8172,930 8169.61,932.39 R165.1@8168.39,932.39 ; R163.1@8174.63,1086 R164.2@8174.63,1038 C170.2@8174.63,990 8174.63,938.63 8172,936 R165.1@8168.39,932.39
NET00154: C172.1 R165.2 U34.3 | length 108.1
  Top Layer, Top w9.84: U34.3@8119.95,855.61 8169.61,855.61 8172,858 R165.2@8172,854.63 8217.37,854.63 8220,852 C172.1@8220,854.63
NET00160: R95.1 U27.12 | length 39.7
  Top Layer, Top w9.84: U27.12@5820.27,1766.83 5852.83,1766.83 5856,1770 R95.1@5858.63,1770
NET00161: C117.1 R95.2 | length 49.6
  Top Layer, Top w9.84: C117.1@5937.37,1722 5940,1728 5937.37,1730.63 R95.2@5937.37,1770
NET00162: R94.1 U27.24 | length 71.8
  Top Layer, Top w9.84: U27.24@5889.17,2052.27 5918.9,2082 R94.1@5948.63,2082
NET00164: C116.1 U27.23 | length 60.1
  Top Layer, Top w9.84: U27.23@5889.17,2032.58 5944.58,2032.58 5946,2034 C116.1@5948.63,2034
NET00180: R121.2 U29.3 | length 175.9
  Top Layer, Top w9.84: R121.2@7214.63,768 7218,762 7264,716 U29.3@7368,716
NET00181: R121.1 U29.2 | length 75.5
  Top Layer, Top w9.84: R121.1@7293.37,768 7296,768 7298,766 U29.2@7368,766
NET00182: C131.2 R113.1 U29.1 | length 149.3
  Top Layer, Top w9.84: C131.2@7293.37,816 U29.1@7368,816 v1(7440,816)
  Bottom Layer, Bottom w9.84: R113.1@7440,813.37 v1(7440,816)
NET00183: C137.2 R113.2 R118.1 R119.2 U29.4 | length 259.8
  Top Layer, Top w9.84: C137.2@7290,666 C137.2@7293.37,666 U29.4@7368,666 7422,666 v1(7440,684)
  Bottom Layer, Bottom w9.84: R119.2@7440,681.37 v1(7440,684) ; R113.2@7440,734.63 v1(7440,684) ; R118.1@7488,681.37 7442.63,681.37 v1(7440,684)
NET00184: C136.2 R112.2 R117.1 R118.2 U29.10 | length 254.1
  Top Layer, Top w9.84: v1(7536,600) 7552,616 U29.10@7604.22,616 7676,616 R112.2@7680,612 ; C136.2@7678,640 C136.2@7680,642 ; R112.2@7680,597.37 R112.2@7680,612 ; C136.2@7682.63,642 C136.2@7680,642 ; R112.2@7680,612 C136.2@7680,642
  Bottom Layer, Bottom w9.84: R118.2@7488,602.63 7533.37,602.63 v1(7536,600) R117.1@7536,602.63
NET00185: C130.2 R112.1 U29.8 | length 130.1
  Top Layer, Top w9.84: U29.8@7604.22,516 7680,516 R112.1@7680,518.63 7725.37,518.63 7728,516 C130.2@7728,518.63
NET00186: R123.1 U29.12 | length 86.8
  Top Layer, Top w9.84: U29.12@7604.22,716 7682,716 7686,720 R123.1@7682.63,720
NET00187: C118.1 U27.8 | length 56.1
  Top Layer, Top w9.84: U27.8@5741.53,1766.83 5741.53,1728.47 v1(5748,1722)
  Bottom Layer, Bottom w9.84: v1(5748,1722) C118.1@5748,1730.63
NET00188: R127.1 U29.5 | length 75.5
  Top Layer, Top w9.84: R127.1@7293.37,618 7296,618 7298,616 U29.5@7368,616
NET00196: C139.2 C141.1 R125.1 U29.6 | length 213.5
  Top Layer, Top w9.84: C141.1@7293.37,516 7293.37,561.37 R125.1@7296,564 ; R125.1@7293.37,564 R125.1@7296,564 ; v1(7446,546) 7426,566 U29.6@7368,566 7298,566 R125.1@7296,564
  Bottom Layer, Bottom w9.84: v1(7446,546) C139.2@7448.63,546
NET00202: C129.2 R111.1 U28.1 | length 149.3
  Top Layer, Top w9.84: C129.2@7362,2535.37 U28.1@7362,2610 v1(7362,2682)
  Bottom Layer, Bottom w9.84: v1(7362,2682) R111.1@7364.63,2682
NET00203: R36.2 R37.1 U10.6 | length 119.3
  Bottom Layer, Bottom w9.84: R37.1@6336,4923.37 6375.37,4923.37 R36.2@6378,4926 ; R36.2@6378,4922.63 R36.2@6378,4926 ; U10.6@6450,4924 6380,4924 R36.2@6378,4926
NET00204: R120.1 U28.2 | length 75.5
  Top Layer, Top w9.84: R120.1@7410,2535.37 7410,2538 7412,2540 U28.2@7412,2610
NET00205: R122.1 U28.12 | length 86.8
  Top Layer, Top w9.84: R122.1@7458,2924.63 7458,2928 7462,2924 U28.12@7462,2846.22
NET00206: C138.2 C140.1 R124.1 U28.6 | length 333.4
  Top Layer, Top w9.84: R124.1@7614,2535.37 R124.1@7614,2538 ; v1(7632,2688) 7612,2668 U28.6@7612,2610 7612,2540 R124.1@7614,2538 ; C140.1@7668,2391.37 7668,2484 R124.1@7614,2538
  Bottom Layer, Bottom w9.84: v1(7632,2688) C138.2@7632,2690.63
NET00209: C134.2 R111.2 R115.1 R116.2 U28.4 | length 259.8
  Top Layer, Top w9.84: v1(7494,2682) 7512,2664 U28.4@7512,2610 C134.2@7512,2535.37 C134.2@7512,2532
  Bottom Layer, Bottom w9.84: R111.2@7443.37,2682 v1(7494,2682) ; R116.2@7496.63,2682 v1(7494,2682) ; R115.1@7496.63,2730 7496.63,2684.63 v1(7494,2682)
NET00210: R120.2 U28.3 | length 175.9
  Top Layer, Top w9.84: R120.2@7410,2456.63 7416,2460 7462,2506 U28.3@7462,2610
NET00211: C133.2 R110.2 R114.1 R115.2 U28.10 | length 254.1
  Top Layer, Top w9.84: C133.2@7536,2924.63 C133.2@7536,2922 ; C133.2@7538,2920 C133.2@7536,2922 ; v1(7578,2778) 7562,2794 U28.10@7562,2846.22 7562,2918 R110.2@7566,2922 ; R110.2@7580.63,2922 R110.2@7566,2922 ; C133.2@7536,2922 R110.2@7566,2922
  Bottom Layer, Bottom w9.84: R115.2@7575.37,2730 7575.37,2775.37 v1(7578,2778) R114.1@7575.37,2778
NET00212: R126.1 U28.5 | length 82.2
  Top Layer, Top w9.84: R126.1@7560,2535.37 7560,2532 7562,2534 U28.5@7562,2610
NET00213: C128.2 R110.1 U28.8 | length 130.1
  Top Layer, Top w9.84: C128.2@7659.37,2970 7662,2970 7659.37,2967.37 R110.1@7659.37,2922 7662,2922 U28.8@7662,2846.22
NET00214: C128.1 R108.2 | length 94
  Top Layer, Top w9.84: C128.1@7580.63,2970 7578,2970 7581.37,2973.37 R108.2@7581.37,3060
NET00216: C172.2 J38.1 R166.2 | length 165.7
  Top Layer, Top w9.84: C172.2@8220,933.37 8265.37,933.37 R166.2@8268,936 ; R166.2@8268,933.37 R166.2@8268,936 ; J38.1@8382,936 R166.2@8268,936
NET00230: R38.1 R39.2 U10.11 | length 120.8
  Bottom Layer, Bottom w9.84: U10.11@6863.39,4924 6932,4924 6936,4920 R39.2@6936,4922.63 6942,4920 6945.37,4923.37 R38.1@6978,4923.37
NET00232: R35.1 R37.2 | length 83.3
  Bottom Layer, Bottom w9.84: R35.1@6336,4761.37 R37.2@6336,4844.63
NET00236: U34.7 U34.12 | length 287.7
  Top Layer, Top w5.98: U34.12@7864.05,906.8 7919.2,906.8 7932,894 7962,894 8025.98,957.98 U34.7@8119.95,957.98
NET00240: C41.2 R41.1 R42.1 U11.8 | length 376.8
  Top Layer, Top w7.87: v1(6894,3978) 6936,3936 U11.8@7026.07,3936
  Bottom Layer, Bottom w7.87: R41.1@6750,4104 6750,4068 6840,3978 C41.2@6840,3975.37 6840,3972 6843.37,3975.37 R42.1@6894,3975.37 v1(6894,3978)
NET00241: U33.7 U33.12 | length 277.1
  Top Layer, Top w9.84: U33.7@7744.05,3008.02 7850.02,3008.02 7901.2,3059.2 U33.12@7999.95,3059.2
NET00243: U4.1 U4.4 U4.5 | length 132
  Mid-Layer 2, VCC w9.84: U4.1@5424,5598 5556,5598
NET00244: C56.2 R48.1 U13.64 | length 124.4
  Top Layer, Top w7.87: R48.1@6915.37,4350 6960,4350 C56.2@6960,4346.63 6960,4338 6969.64,4328.36 U13.64@7023.78,4328.36
NET00245: C56.1 R47.1 U13.63 | length 168.4
  Top Layer, Top w7.87: R47.1@6915.37,4422 6960,4422 C56.1@6960,4425.37 6962.63,4425.37 6990,4398 6990,4356 6997.95,4348.05 U13.63@7023.78,4348.05
NET00246: C46.2 R46.1 U13.2 | length 108
  Top Layer, Top w7.87: U13.2@7132.05,4239.78 7132.05,4213.95 7152,4194 C46.2@7158,4194 ; R46.1@7158,4149.37 C46.2@7158,4194 ; C46.2@7161.37,4194 C46.2@7158,4194
NET00247: C46.1 R45.1 U13.1 | length 108.2
  Top Layer, Top w7.87: C46.1@7082.63,4194 C46.1@7086,4194 ; R45.1@7086,4149.37 C46.1@7086,4194 ; U13.1@7112.36,4239.78 7112.36,4214.36 7092,4194 C46.1@7086,4194
NET00248: C45.2 R44.1 U13.4 | length 293.9
  Top Layer, Top w5.98: C45.2@6960,4293.37 6966,4284 7146,4284 7171.42,4258.58 U13.4@7171.42,4239.78
  Top Layer, Top w7.87: R44.1@6915.37,4290 6960,4290 C45.2@6960,4293.37
NET00249: C45.1 R43.1 U13.3 | length 290.1
  Top Layer, Top w5.98: C45.1@6960,4214.63 6966,4224 7014,4272 7140,4272 7151.73,4260.27 U13.3@7151.73,4239.78
  Top Layer, Top w7.87: R43.1@6915.37,4218 6960,4218 C45.1@6960,4214.63
NET00261: C164.2 R159.2 R160.2 R161.1 R162.2 U33.4 U33.6 | length 350.1
  Top Layer, Top w9.84: R160.2@7632,3036 R160.2@7632,3032.63 7676.63,3032.63 R159.2@7677.61,3033.61 ; R159.2@7680,3024 R159.2@7680,3032.63 ; U33.6@7744.05,3033.61 R159.2@7680,3033.61 ; U33.4@7744.05,3084.8 7716.8,3084.8 7680,3048 v1(7680,3036) ; R159.2@7677.61,3033.61 R159.2@7677.84,3033.84 ; R159.2@7677.61,3033.61 7676.39,3033.61 7674,3036 R159.2@7677.84,3033.84 ; R159.2@7677.61,3033.61 R159.2@7678.25,3033.61 ; R159.2@7677.84,3033.84 v1(7680,3036) ; R159.2@7677.84,3033.84 R159.2@7678.25,3033.61 ; R159.2@7678.25,3033.61 R159.2@7680,3033.61 ; R159.2@7678.25,3033.61 R159.2@7680,3032.63 ; R159.2@7680,3032.63 R159.2@7680,3033.61 ; R159.2@7680,3033.61 v1(7680,3036)
  Bottom Layer, Bottom w9.84: R161.1@7632,3024 R161.1@7632,3032.63 ; C164.2@7680,3032.63 v1(7680,3036) ; R162.2@7728,3032.63 7683.37,3032.63 v1(7680,3036) ; R161.1@7632,3032.63 R161.1@7632,3036 ; R161.1@7632,3032.63 R161.1@7632,3036 ; R161.1@7632,3036 v1(7680,3036)
NET00262: C158.2 R159.1 R160.1 U33.3 | length 170.9
  Top Layer, Top w9.84: R160.1@7632,3111.37 7677.37,3111.37 7680,3114 R159.1@7680,3111.37 7686,3108 7688.39,3110.39 U33.3@7744.05,3110.39
  Top Layer, Top w16.38: C158.2@7581.37,3114 7632,3114 R160.1@7632,3111.37
NET00263: U33.5 U33.14 | length 277.1
  Top Layer, Top w9.84: U33.5@7744.05,3059.2 7847.2,3059.2 7898.39,3110.39 U33.14@7999.95,3110.39
NET00264: J36.1 R167.2 R168.2 | length 253.1
  Top Layer, Top w9.84: R167.2@8265.37,2982 8358,2982 J36.1@8382,3006 8358,3030 R168.2@8265.37,3030
NET00265: C169.2 R167.1 R168.1 | length 99.8
  Top Layer, Top w9.84: C169.2@8133.37,3006 8160,3006 ; R167.1@8186.63,2982 8184,2982 8160,3006 ; R168.1@8186.63,3030 8184,3030 8160,3006
NET00266: C169.1 U33.10 | length 55.5
  Top Layer, Top w9.84: U33.10@7999.95,3008.02 8049.98,3008.02 8052,3006 C169.1@8054.63,3006
NET00267: D16.1 U34.10 | length 55.8
  Top Layer, Top w9.84: D16.1@7809.47,958.5 7812,960 7814.02,957.98 U34.10@7864.05,957.98
NET00271: D16.3 R158.2 | length 39.7
  Top Layer, Top w9.84: R158.2@7713.37,960 7716,960 7718.47,962.47 D16.3@7718.47,996
NET00272: C130.1 R109.2 | length 249.2
  Top Layer, Top w9.84: C130.1@7728,597.37 7728,600 7788,600 7812,624 R109.2@7812,776.63
NET00273: C156.2 R150.2 R151.2 R152.1 R153.2 U32.4 U32.6 U32.8 | length 744
  Top Layer, Top w9.84: R151.2@5186.63,888 5196,894 5226,924 U32.4@5226,960 5226,1032 v1(5292,1098) ; R150.2@5318.63,888 5322,888 5326,892 U32.6@5326,960 5326,1064 v1(5292,1098) ; U32.8@5376,1196.22 5376,1152 5358,1134 5328,1134 v1(5292,1098)
  Bottom Layer, Bottom w9.84: C156.2@5235.37,1146 5232,1146 5235.37,1142.63 R153.2@5235.37,1098 R152.1@5288.63,1098 v1(5292,1098)
NET00274: C154.2 R150.1 U32.7 | length 151.3
  Top Layer, Top w9.84: R150.1@5394,882 R150.1@5397.37,888 5400,888 5376,912 U32.7@5376,960 5418,960 5424,954 C154.2@5424,944.63
NET00275: C155.2 R151.1 U32.5 | length 160.1
  Top Layer, Top w9.84: U32.5@5276,960 5276,890 5274,888 R151.1@5265.37,888 5265.37,878.63 5304,840 C155.2@5318.63,840
NET00288: R140.2 R142.1 U30.1 | length 368.7
  Top Layer, Top w9.84: R140.2@7716,2391.37 7716,2388 7764,2340 U30.1@7764,2238 7824,2178 R142.1@7824,2067.37
NET00289: R136.1 R137.2 R140.1 U30.2 | length 232.2
  Top Layer, Top w9.84: R140.1@7716,2312.63 7716,2316 7714,2314 U30.2@7714,2238 7714,2168 v1(7734,2148)
  Bottom Layer, Bottom w9.84: R137.2@7734,2145.37 v1(7734,2148) 7736.63,2145.37 R136.1@7782,2145.37
NET00292: C146.1 R142.2 R146.1 | length 421.5
  Top Layer, Top w9.84: R146.1@7662,1670.63 7712.63,1670.63 7716,1674 C146.1@7716,1670.63 7824,1778.63 R142.2@7824,1988.63
NET00293: C150.2 R146.2 U30.14 | length 162.9
  Top Layer, Top w9.84: R146.2@7662,1749.37 7662,1752 7664,1754 U30.14@7664,1824.61 7664,1906 v1(7662,1908)
  Bottom Layer, Bottom w9.84: v1(7662,1908) C150.2@7662,1910.63
NET00294: C147.1 R143.2 R147.1 | length 453.7
  Top Layer, Top w9.84: v1(7512,1674) C147.1@7512,1670.63 7563.37,1670.63 7566,1668 R147.1@7566,1670.63
  Bottom Layer, Bottom w9.84: v1(7512,1674) R143.2@7512,2066.63
NET00296: C151.2 R147.2 U30.12 | length 169.7
  Top Layer, Top w9.84: R147.2@7566,1749.37 7566,1746 7564,1748 U30.12@7564,1824.61 7564,1906 v1(7566,1908)
  Bottom Layer, Bottom w9.84: v1(7566,1908) C151.2@7566,1910.63
NET00297: C142.1 R128.2 R134.1 | length 519.5
  Top Layer, Top w5.98: C142.1@7512,2391.37 7562.63,2391.37 v1(7566,2388) R134.1@7566,2391.37
  Bottom Layer, Bottom w5.98: v1(7566,2388) 7698,2256 7698,2028 7716,2010 R128.2@7716,1989.37
NET00300: C144.2 R134.2 U30.5 | length 175.7
  Top Layer, Top w9.84: v1(7566,2148) 7564,2150 U30.5@7564,2238 7564,2314 7566,2316 R134.2@7566,2312.63
  Bottom Layer, Bottom w9.84: C144.2@7566,2145.37 v1(7566,2148)
NET00304: C149.1 R145.2 R149.1 | length 453.7
  Top Layer, Top w9.84: R149.1@6404.63,738 6402,738 6404.63,740.63 C149.1@6404.63,792 v1(6408,792)
  Bottom Layer, Bottom w9.84: v1(6408,792) R145.2@6800.63,792
NET00305: C143.1 R129.2 R135.1 | length 519.5
  Top Layer, Top w5.98: R135.1@7125.37,738 v1(7122,738) 7125.37,741.37 C143.1@7125.37,792
  Bottom Layer, Bottom w5.98: R129.2@6723.37,588 6744,588 6762,606 6990,606 v1(7122,738)
NET00313: C145.2 R135.2 U31.5 | length 175.7
  Top Layer, Top w9.84: v1(6882,738) 6884,740 U31.5@6972,740 7048,740 7050,738 R135.2@7046.63,738
  Bottom Layer, Bottom w9.84: C145.2@6879.37,738 v1(6882,738)
NET00316: C148.1 R144.2 R148.1 | length 421.5
  Top Layer, Top w9.84: R148.1@6404.63,642 6404.63,591.37 6408,588 C148.1@6404.63,588 6512.63,480 R144.2@6722.63,480
NET00318: R138.1 R139.2 R141.1 U31.2 | length 232.2
  Top Layer, Top w9.84: v1(6882,570) 6902,590 U31.2@6972,590 7048,590 7050,588 R141.1@7046.63,588
  Bottom Layer, Bottom w9.84: R138.1@6879.37,522 6879.37,567.37 v1(6882,570) R139.2@6879.37,570
NET00321: C143.2 R145.1 U31.6 U31.7 | length 278.8
  Top Layer, Top w9.84: U31.7@6972,840 6930,840 v1(6882,792) 6884,790 U31.6@6972,790 7042,790 7044,792 C143.2@7046.63,792
  Bottom Layer, Bottom w9.84: R145.1@6879.37,792 v1(6882,792)
NET00325: C153.2 R149.2 U31.12 | length 169.7
  Top Layer, Top w9.84: R149.2@6483.37,738 6480,738 6482,740 U31.12@6558.61,740 6640,740 v1(6642,738)
  Bottom Layer, Bottom w9.84: v1(6642,738) C153.2@6644.63,738
NET00329: C148.2 R129.1 U31.15 U31.16 | length 266.2
  Top Layer, Top w9.84: C148.2@6483.37,588 6486,588 6488,590 U31.15@6558.61,590 6640,590 v1(6642,588) 6594,540 U31.16@6558.61,540
  Bottom Layer, Bottom w9.84: v1(6642,588) R129.1@6644.63,588
NET00331: R141.2 R144.1 U31.1 | length 368.7
  Top Layer, Top w9.84: R144.1@6801.37,480 6912,480 U31.1@6972,540 7074,540 7122,588 R141.2@7125.37,588
NET00333: C152.2 R148.2 U31.14 | length 162.9
  Top Layer, Top w9.84: R148.2@6483.37,642 6486,642 6488,640 U31.14@6558.61,640 6640,640 v1(6642,642)
  Bottom Layer, Bottom w9.84: v1(6642,642) C152.2@6644.63,642
NET00342: R180.2 R181.2 R186.1 U36.2 | length 209.9
  Top Layer, Top w7.87: U36.2@5695.14,6741.36 5732.74,6741.36 v1(5743.17,6730.93)
  Bottom Layer, Bottom w7.87: R181.2@5683.13,6710.26 5722.5,6710.26 v1(5743.17,6730.93) ; R180.2@5683.13,6763.61 5710.5,6763.61 v1(5743.17,6730.93) ; R186.1@5743.17,6715.57 v1(5743.17,6730.93)
NET00347: R182.2 R183.2 R187.1 U36.6 | length 214.7
  Top Layer, Top w7.87: U36.6@5887.07,6715.77 5929.93,6715.77 v1(5949.7,6696)
  Bottom Layer, Bottom w7.87: R183.2@5851.24,6763.61 R182.2@5899.28,6763.61 5906.09,6763.61 5949.7,6720 v1(5949.7,6696) R187.1@5949.7,6692.63
NET00351: C177.1 R174.2 U35.1 | length 160.8
  Top Layer, Top w7.87: U35.1@5232.87,6676.38 v1(5316.93,6676.38)
  Bottom Layer, Bottom w7.87: R174.2@5320.28,6676.38 v1(5316.93,6676.38) 5320.28,6679.72 C177.1@5388.98,6679.72
NET00352: R169.2 R174.1 U35.2 | length 227.8
  Top Layer, Top w7.87: U35.2@5207.28,6676.38 5207.28,6722.83 v1(5220.87,6736.42)
  Bottom Layer, Bottom w7.87: R169.2@5152.17,6676.38 5160.83,6676.38 v1(5220.87,6736.42) 5241.54,6715.75 R174.1@5241.54,6676.38
NET00354: C173.2 R169.1 R170.1 R171.1 | length 191
  Bottom Layer, Bottom w7.87: R170.1@5073.43,6556.3 5073.43,6612.99 5076.77,6616.34 R171.1@5073.43,6616.34 5073.43,6673.03 R169.1@5076.77,6676.38 ; R169.1@5073.43,6676.38 R169.1@5076.77,6676.38 ; C173.2@5073.43,6736.42 5073.43,6679.72 R169.1@5076.77,6676.38
NET00355: C173.1 J40.2 | length 168.5
  Bottom Layer, Bottom w7.87: C173.1@5152.17,6736.42 5248.23,6832.48 J40.2@5280.87,6832.48
NET00357: R175.1 U35.6 U35.7 | length 175.1
  Top Layer, Top w7.87: U35.6@5181.69,6484.45 5181.69,6439.37 v1(5196.85,6424.21) 5207.28,6434.65 U35.7@5207.28,6484.45
  Bottom Layer, Bottom w7.87: v1(5196.85,6424.21) R175.1@5240.91,6424.21
NET00358: D17.3 J41.2 U36.3 | length 361.9
  Top Layer, Top w7.87: D17.3@5482.54,6736.42 v1(5485.04,6736.42) ; v1(5619.7,6768) 5619.7,6726 5629.93,6715.77 U36.3@5695.14,6715.77
  Bottom Layer, Bottom w7.87: v1(5485.04,6736.42) 5521.06,6736.42 5600.65,6816 5601.7,6816 J41.2@5617.09,6832.48 5619.7,6829.87 v1(5619.7,6768)
NET00359: C177.2 D17.1 D17.2 R176.2 | length 266.3
  Top Layer, Top w7.87: v1(5388.98,6604.33) D17.2@5388.98,6700.39 ; D17.2@5391.54,6698.92 D17.2@5388.98,6700.39 ; D17.1@5391.54,6773.92 5388.98,6771.36 D17.2@5388.98,6700.39
  Bottom Layer, Bottom w7.87: R176.2@5388.98,6511.61 C177.2@5388.98,6600.98 v1(5388.98,6604.33)
NET00360: C179.2 R177.1 U37.3 | length 219.9
  Top Layer, Top w7.87: U37.3@6071.65,6453.61 6141.17,6453.61 v1(6198.43,6510.87)
  Bottom Layer, Bottom w7.87: R177.1@6195.91,6510.87 v1(6198.43,6510.87) 6261.73,6510.87 C179.2@6264.25,6513.39
NET00361: U37.5 U37.14 | length 277.1
  Top Layer, Top w7.87: U37.14@5815.75,6453.61 5923.31,6453.61 5974.5,6504.8 U37.5@6071.65,6504.8
NET00362: C186.2 R196.1 R197.1 | length 101.7
  Bottom Layer, Bottom w7.87: C186.2@5686.3,6552.76 5686.3,6507.4 R196.1@5683.78,6504.88 ; R197.1@5687.24,6457.01 5687.24,6501.42 R196.1@5683.78,6504.88 ; R196.1@5687.24,6504.88 R196.1@5683.78,6504.88
NET00363: U37.7 U37.12 | length 277.1
  Top Layer, Top w7.87: U37.12@5815.75,6504.8 5920.5,6504.8 5971.68,6555.98 U37.7@6071.65,6555.98
NET00364: C186.1 U37.10 | length 52
  Top Layer, Top w7.87: v1(5767.56,6552.76) 5770.78,6555.98 U37.10@5815.75,6555.98
  Bottom Layer, Bottom w7.87: C186.1@5765.04,6552.76 v1(5767.56,6552.76)
NET00365: C180.2 R177.2 R178.1 R179.2 U37.4 U37.6 | length 268.8
  Top Layer, Top w7.87: U37.4@6071.65,6479.2 6073.39,6480.94 6096.69,6480.94 v1(6114.65,6498.9) 6114.65,6510.87 6095.13,6530.39 U37.6@6071.65,6530.39
  Bottom Layer, Bottom w7.87: R178.1@6114.65,6555.28 6114.65,6516.85 R177.2@6117.17,6510.87 6114.65,6504.88 v1(6114.65,6498.9) R179.2@6114.65,6466.46 6114.65,6462.99 6171.02,6462.99 C180.2@6174.49,6466.46
NET00367: J42.2 R196.2 R197.2 | length 1090.6
  Top Layer, Top w16.38: v1(4968.7,6832.48) 4971.01,6830.17 cw(c4860.63,6719.79) 5016.73,6719.79 5016.73,6496.26 ccw(c5148.82,6496.26) 5148.82,6364.17 5384.25,6364.17 ccw(c5384.25,6675.35) 5604.29,6455.32 v1(5605.98,6457.01)
  Bottom Layer, Bottom w7.87: R197.2@5608.5,6457.01 v1(5605.98,6457.01) 5608.5,6459.53 R196.2@5608.5,6504.88
NET00368: C181.1 R184.2 R185.2 U36.5 | length 283.9
  Top Layer, Top w7.87: v1(5823.7,6726) 5823.7,6720 5853.52,6690.18 U36.5@5887.07,6690.18
  Bottom Layer, Bottom w7.87: C181.1@5806.56,6839 5823.7,6821.86 v1(5823.7,6726) 5839.44,6710.26 R185.2@5851.24,6710.26 R184.2@5899.28,6710.26
pads on no net: D13.2 D14.1 D16.2 J3.11 J3.12 J6.1 J7.1 J8.1 J9.1 J18.11 J18.12 J19.9 J19.10 J19.11 J19.12 J21.4 J28.11 J28.12 J35.1 J35.18 S1.3 S2.3 S3.3 S4.3 U1.5 U1.6 U1.7 U1.8 U1.9 U1.10 U1.11 U1.12 U3.4 U3.8 U9.11 U9.14 U10.8 U10.9 U13.13 U13.14 U13.15 U13.16 U13.17 U13.29 U13.45 U13.46 U13.47 U13.48 U13.49 U13.50 U13.51 U13.52 U13.55 U13.61 U13.62 U15.1 U15.4 U16.1 U16.4 U17.1 U17.4 U18.1 U18.4 U19.8 U19.9 U19.10 U21.5 U21.6 U21.7 U21.8 U21.9 U23.4 U23.8 U24.2 U26.10 U26.38 U27.10 U27.38 U27.45 U28.7 U28.9 U28.11 U28.13 U29.7 U29.9 U29.11 U29.13 U30.8 U30.9 U31.8 U31.9 U32.10 U32.11 U32.13

## Polygon pours and split planes (outlines as drawn)
1_RECTIFIED on Top Layer, Top (solid, remove dead copper, pour order 2): 420,4566 426,4560 1674,4560 1680,4554 1680,3786 1686,3780 1974,3780 1980,3786 1980,5154 1974,5160 1266,5160 1260,5166 1260,5334 1254,5340 426,5340 420,5334
6_IN1 on Top Layer, Top (solid, remove dead copper, pour order 0): 6776.71,6338.58 6782.47,6324.66 6796.39,6318.9 8056.24,6318.9 8070.16,6324.66 8075.92,6338.58 8075.92,6850.39 8070.16,6864.31 8056.24,6870.08 6796.39,6870.08 6782.47,6864.31 6776.71,6850.39
6_OUT on Bottom Layer, Bottom (solid, remove dead copper, pour order 4): 7209.78,6338.58 7215.55,6324.66 7229.46,6318.9 8292.46,6318.9 8306.38,6324.66 8312.14,6338.58 8312.14,6850.39 8306.38,6864.31 8292.46,6870.08 7229.46,6870.08 7215.55,6864.31 7209.78,6850.39
3_GND on Mid-Layer 1, GND (solid, remove dead copper, pour order 16): 4251.97,433.07 4279.81,444.6 4291.34,472.44 4291.34,3464.57 4279.81,3492.41 4251.97,3503.94 472.44,3503.94 444.6,3492.41 433.07,3464.57 433.07,472.44 444.6,444.6 472.44,433.07
1_GND on Mid-Layer 1, GND (solid, remove dead copper, pour order 14): 433.07,3818.9 444.6,3791.06 472.44,3779.53 4645.67,3779.53 4673.51,3791.06 4685.04,3818.9 4685.04,6811.02 4673.51,6838.86 4645.67,6850.39 472.44,6850.39 444.6,6838.86 433.07,6811.02
4_GND on Mid-Layer 1, GND (solid, remove dead copper, pour order 12): 8425.2,3464.57 8413.67,3492.41 8385.83,3503.94 4606.3,3503.94 4578.46,3492.41 4566.93,3464.57 4566.93,472.44 4578.46,444.6 4606.3,433.07 8385.83,433.07 8413.67,444.6 8425.2,472.44
2_GND on Mid-Layer 1, GND (solid, remove dead copper, pour order 10): 4960.63,3818.9 4972.16,3791.06 5000,3779.53 8385.83,3779.53 8413.67,3791.06 8425.2,3818.9 8425.2,6023.62 8413.67,6051.46 8385.83,6062.99 5000,6062.99 4972.16,6051.46 4960.63,6023.62
5_GND on Mid-Layer 1, GND (solid, remove dead copper, pour order 8): 4940.94,6377.95 4946.71,6364.03 4960.63,6358.27 6259.84,6358.27 6273.76,6364.03 6279.53,6377.95 6279.53,6850.39 6273.76,6864.31 6259.84,6870.08 4960.63,6870.08 4946.71,6864.31 4940.94,6850.39
6_IN2 on Mid-Layer 1, GND (solid, remove dead copper, pour order 6): 6776.71,6338.58 6782.47,6324.66 6796.39,6318.9 8056.24,6318.9 8070.16,6324.66 8075.92,6338.58 8075.92,6850.39 8070.16,6864.31 8056.24,6870.08 6796.39,6870.08 6782.47,6864.31 6776.71,6850.39
3_3.3V on Mid-Layer 2, VCC (solid, remove dead copper, pour order 50): 4251.97,433.07 4279.81,444.6 4291.34,472.44 4291.34,3464.57 4279.81,3492.41 4251.97,3503.94 472.44,3503.94 444.6,3492.41 433.07,3464.57 433.07,472.44 444.6,444.6 472.44,433.07
4_10V on Mid-Layer 2, VCC (solid, remove dead copper, pour order 48): 4566.93,472.44 4578.46,444.6 4606.3,433.07 8385.83,433.07 8413.67,444.6 8425.2,472.44 8425.2,3464.57 8413.67,3492.41 8385.83,3503.94 4606.3,3503.94 4578.46,3492.41 4566.93,3464.57
4_3.3V on Mid-Layer 2, VCC (solid, remove dead copper, pour order 46): 4566.93,984.25 4578.46,956.41 4606.3,944.88 5118.11,944.88 5145.95,956.41 5157.48,984.25 5157.48,1653.54 5169.01,1681.38 5196.85,1692.91 6220.47,1692.91 6248.31,1704.44 6259.84,1732.28 6259.84,3464.57 6248.31,3492.41 6220.47,3503.94 4606.3,3503.94 4578.46,3492.41 4566.93,3464.57
4_1.8V on Mid-Layer 2, VCC (solid, remove dead copper, pour order 44): 6220.47,1692.91 6248.31,1704.44 6259.84,1732.28 6259.84,2834.65 6248.31,2862.48 6220.47,2874.02 5590.55,2874.02 5562.71,2862.48 5551.18,2834.65 5551.18,1732.28 5562.71,1704.44 5590.55,1692.91
5_10V on Mid-Layer 2, VCC (solid, remove dead copper, pour order 42): 4940.94,6377.95 4946.71,6364.03 4960.63,6358.27 6259.84,6358.27 6273.76,6364.03 6279.53,6377.95 6279.53,6850.39 6273.76,6864.31 6259.84,6870.08 4960.63,6870.08 4946.71,6864.31 4940.94,6850.39
1_565V on Mid-Layer 2, VCC (solid, remove dead copper, pour order 40): 1673.97,3774.03 1680,3780.03 1680,4314 1686,4320 2574,4320 2580,4326 2580,4854 2574,4860 426,4860 420,4854 420,3785.97 425.97,3779.97
1_5V on Mid-Layer 2, VCC (solid, remove dead copper, pour order 38): 4645.67,3779.53 4673.51,3791.06 4685.04,3818.9 4685.04,5787.4 4673.51,5815.24 4645.67,5826.77 4251.97,5826.77 4224.13,5838.3 4212.6,5866.14 4212.6,6023.62 4201.07,6051.46 4173.23,6062.99 3267.72,6062.99 3239.88,6051.46 3228.35,6023.62 3228.35,3818.9 3239.88,3791.06 3267.72,3779.53
3_5V on Mid-Layer 2, VCC (solid, remove dead copper, pour order 36): 4251.97,433.07 4279.81,444.6 4291.34,472.44 4291.34,2086.61 4279.81,2114.45 4251.97,2125.98 2598.43,2125.98 2570.59,2114.45 2559.06,2086.61 2559.06,472.44 2570.59,444.6 2598.43,433.07
6_GND on Mid-Layer 2, VCC (solid, remove dead copper, pour order 34): 7209.78,6338.58 7215.55,6324.66 7229.46,6318.9 8292.46,6318.9 8306.38,6324.66 8312.14,6338.58 8312.14,6850.39 8306.38,6864.31 8292.46,6870.08 7229.46,6870.08 7215.55,6864.31 7209.78,6850.39
2_V1 on Mid-Layer 2, VCC (solid, remove dead copper, pour order 32): 5905.51,5118.11 5917.04,5090.27 5944.88,5078.74 7440.94,5078.74 7468.78,5090.27 7480.31,5118.11 7480.31,5826.77 7468.78,5854.61 7440.94,5866.14 7283.46,5866.14 7255.63,5877.67 7244.09,5905.51 7244.09,6023.62 7232.56,6051.46 7204.72,6062.99 6929.13,6062.99 6901.29,6051.46 6889.76,6023.62 6889.76,5433.07 6878.23,5405.23 6850.39,5393.7 6456.69,5393.7 6428.85,5405.23 6417.32,5433.07 6417.32,6023.62 6405.79,6051.46 6377.95,6062.99 5944.88,6062.99 5917.04,6051.46 5905.51,6023.62
2_3.3V on Mid-Layer 2, VCC (solid, remove dead copper, pour order 30): 7244.09,4763.78 7216.26,4752.25 7204.72,4724.41 7204.72,4291.34 7216.26,4263.5 7244.09,4251.97 7677.17,4251.97 7705,4263.5 7716.54,4291.34 7716.54,4724.41 7705,4752.25 7677.17,4763.78
NET00045 on Mid-Layer 2, VCC (solid, remove dead copper, pour order 28): 2934,4980 2940,4986 2940,6114 2934,6120 2166,6120 2160,6114 2160,4986 2166,4980
NET00019 on Mid-Layer 2, VCC (solid, remove dead copper, pour order 26): 7480.31,5511.81 7491.85,5483.97 7519.69,5472.44 7913.39,5472.44 7941.22,5483.97 7952.76,5511.81 7952.76,5826.77 7941.22,5854.61 7913.39,5866.14 7519.69,5866.14 7491.85,5854.61 7480.31,5826.77
NET00051 on Mid-Layer 2, VCC (solid, remove dead copper, pour order 24): 7952.76,5511.81 7964.29,5483.97 7992.13,5472.44 8346.46,5472.44 8374.3,5483.97 8385.83,5511.81 8385.83,5669.29 8374.3,5697.13 8346.46,5708.66 7992.13,5708.66 7964.29,5697.13 7952.76,5669.29
2_5V on Mid-Layer 2, VCC (solid, remove dead copper, pour order 22): 7204.72,4724.41 7193.19,4752.25 7165.35,4763.78 7047.24,4763.78 7019.41,4752.25 7007.87,4724.41 7007.87,4291.34 7019.41,4263.5 7047.24,4251.97 7165.35,4251.97 7193.19,4263.5 7204.72,4291.34
NET00243 on Mid-Layer 2, VCC (solid, remove dead copper, pour order 20): 5433.07,5511.81 5444.6,5483.97 5472.44,5472.44 5905.51,5472.44 5933.35,5483.97 5944.88,5511.81 5944.88,6023.62 5933.35,6051.46 5905.51,6062.99 5472.44,6062.99 5444.6,6051.46 5433.07,6023.62
NET00002 on Mid-Layer 2, VCC (solid, remove dead copper, pour order 18): 5078.74,5511.81 5090.27,5483.97 5118.11,5472.44 5393.7,5472.44 5421.54,5483.97 5433.07,5511.81 5433.07,6023.62 5421.54,6051.46 5393.7,6062.99 5354.33,6062.99 5326.49,6051.46 5314.96,6023.62 5314.96,5748.03 5303.43,5720.19 5275.59,5708.66 5118.11,5708.66 5090.27,5697.13 5078.74,5669.29

## Keep-outs
Keep-Out Layer, Board:
  lines w7.87: 6628.07,6299.21 8464.57,6299.21 8464.57,6889.76 6628.07,6889.76 6628.06,6299.21
  lines w10: 393.7,393.7 4330.71,393.7 4330.71,3543.31 393.7,3543.31 393.7,393.7 ; 393.7,3740.16 4724.41,3740.16 4724.41,6889.76 393.7,6889.76 393.7,3740.16 ; 4527.56,393.7 8464.57,393.7 8464.57,3543.31 4527.56,3543.31 4527.56,393.7 ; 4921.26,3740.16 8464.57,3740.16 8464.57,6102.36 4921.26,6102.36 4921.26,3740.16 ; 4921.26,6338.58 6299.21,6338.58 6299.21,6889.76 4921.26,6889.76 4921.26,6338.58